# EAGLE board MK-312BT V1.3B (EAGLE 6.6.0)
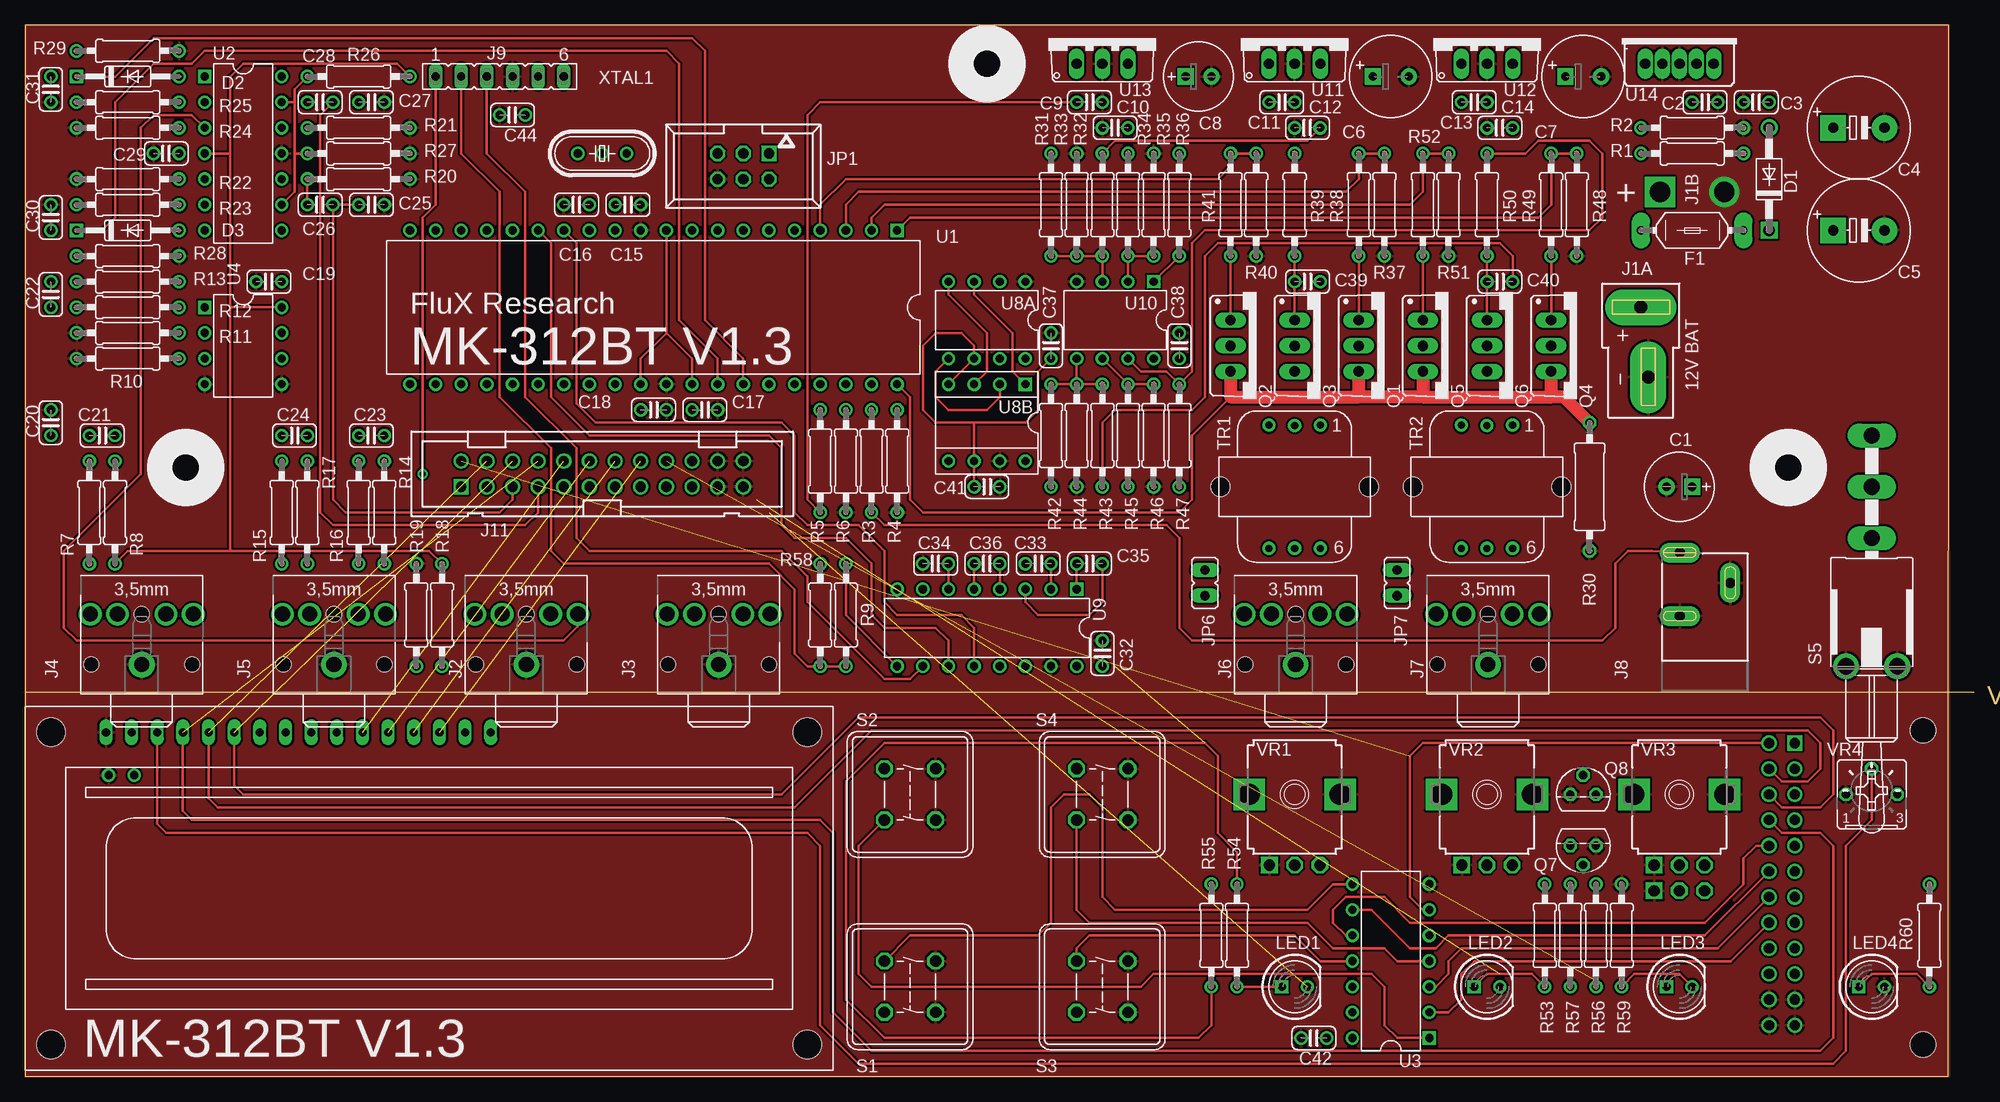
[diagram p0: board, top side]
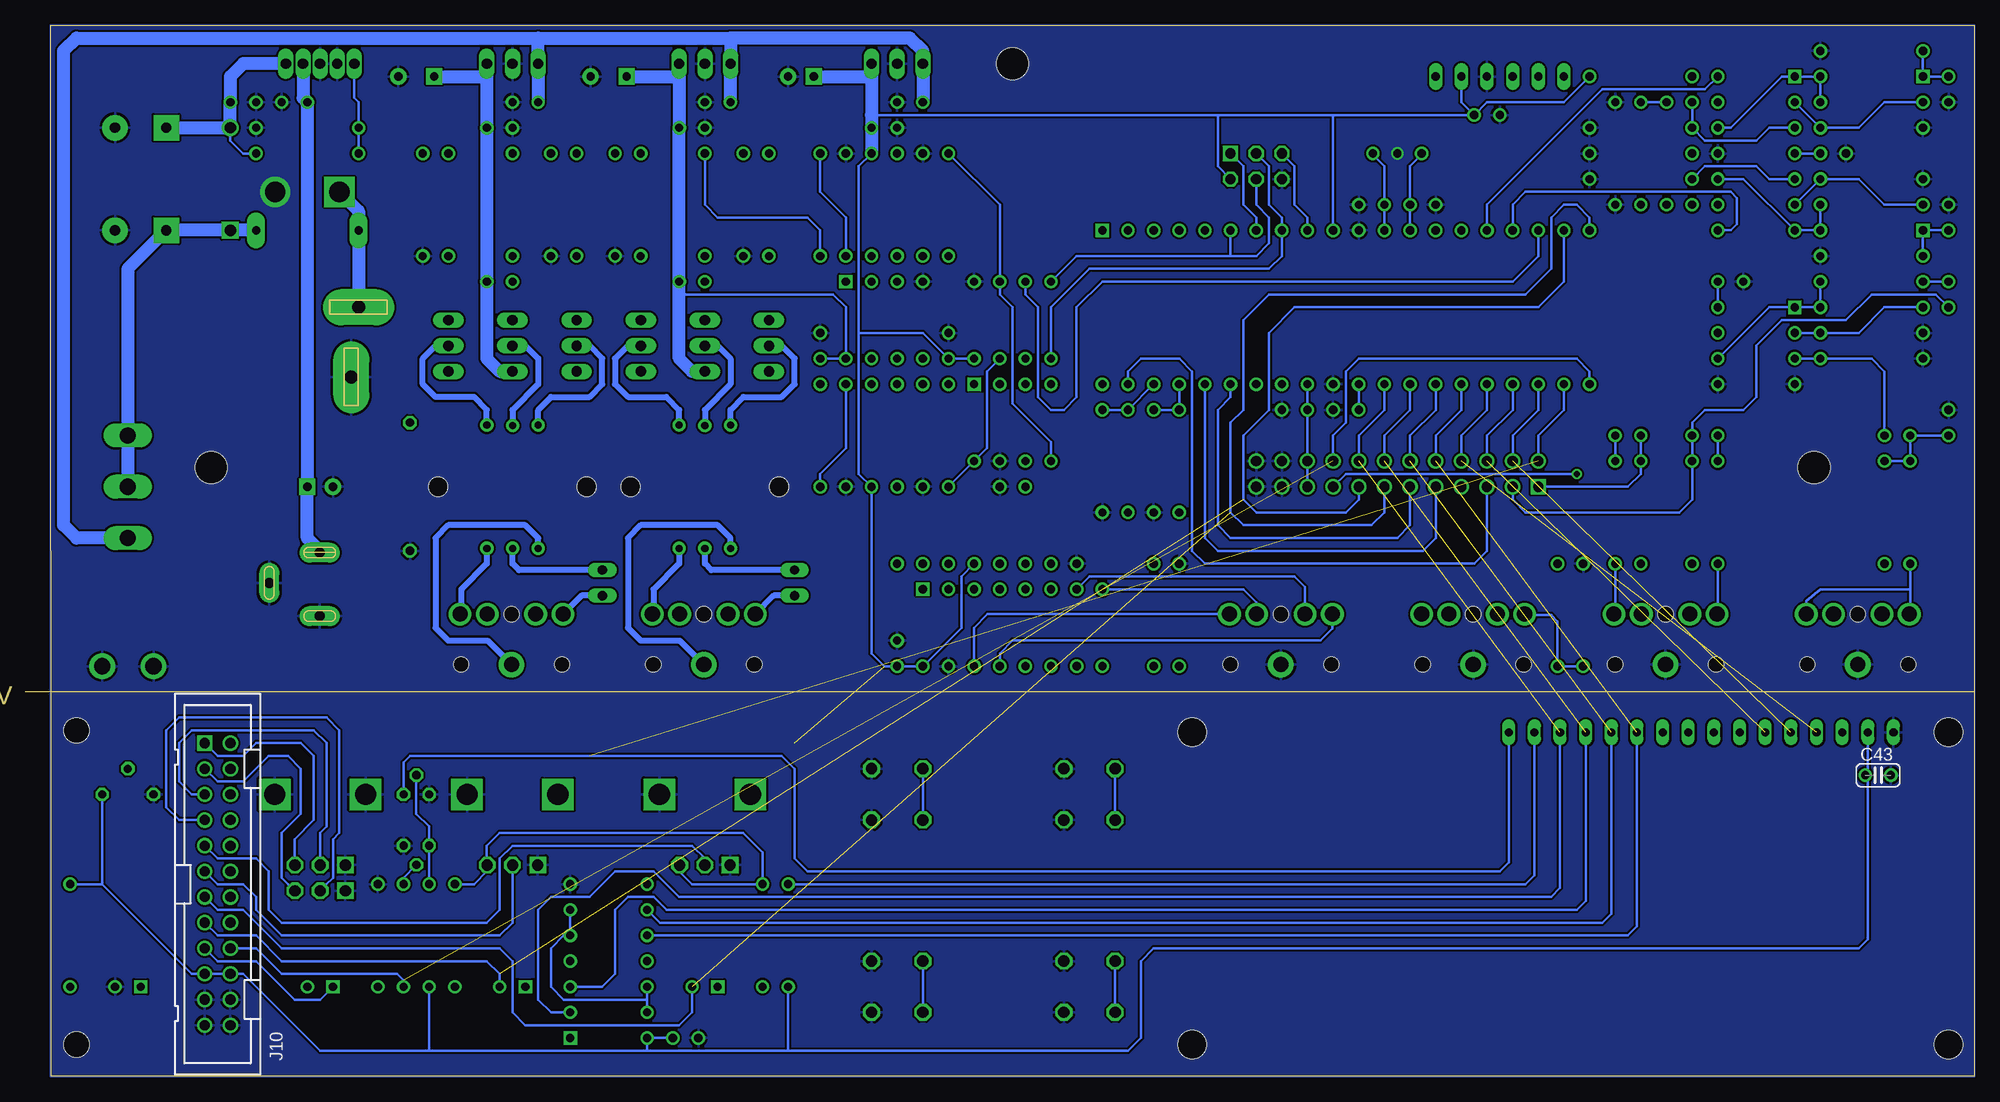
[diagram p1: board, bottom side, seen from below]

Size 193.04 x 104.14 mm. Coordinates in mm from the lower left corner, seen from the top.
Outline: 0,38.1 0,104.14 190.5,104.14 190.48,0 0,0 0,38.1
Outline: 0,38.1 193.04,38.1
Copper layers (1*16): Top 0.035mm / dielectric 1.5mm / Bottom 0.035mm
Design rules "default *": minimum track width 10mil, minimum drill 24mil, track to track 8mil, track to pad 8mil, pad to pad 8mil, via to via 8mil, smd to smd 8mil, copper to edge 0mil, drill to drill 8mil, minimum pad ring 10mil, minimum via ring 8mil, stop-mask expansion 4mil, vias tented up to drill 0mil, thermal gap 10mil
Net classes: 0 default: width 0.4 mm; 1 signal: width 0.254 mm; 2 pwr: width 2 mm
Holes 3.2 mm at 15.88,60.33 174.62,60.33 95.25,100.33
Holes 2.5 mm at 187.96,34.29 187.96,3.17

## Footprints (pad centres in the part's own frame; a part is rotated, then mirrored left to right if it is on the bottom)
E2,5-7 = drill 0.813 pad 1.6 square: + -1.27,0 | drill 0.813 pad 1.6: - 1.27,0
C025-024X044 = drill 0.813: 1 -1.27,0; 2 1.27,0
E5-10,5 = drill 1.016 pad 2.54 square: + -2.54,0 | drill 1.016 pad 2.54: - 2.54,0
E3,5-8 = drill 0.813 pad 1.6 square: + -1.778,0 | drill 0.813 pad 1.6: - 1.778,0
DO41-10 = drill 1.118: A 5.08,0 | drill 1.118 square: C -5.08,0
DO35-10 = drill 0.813: A 5.08,0 | drill 0.813 square: C -5.08,0
LITTLEFUSE = drill 0.813 pad 1.778 long: 1 -5.08,0; 2 5.08,0
DEANS = drill 1.27 pad 3.556 long: + 0,0; - 0.737,-6.921
STX3100 = drill 1.5 pad 2.54: 1 2.7,-0.1 | drill 1.5: 2 7.7,5; 3 7.7,2.3; 4 7.7,-2.5; 5 7.7,-5.2 | hole 1.5: 2.7,4.9; 2.7,-5.1; 7.7,-0.1
POWER_JACK_SLOT = drill 1 pad 2 long: GND@1 2.58,7.5; GND@2 7.58,10.8; PWR 2.58,13.8
FE06 = drill 0.813 long: 1 -6.35,0; 2 -3.81,0; 3 -1.27,0; 4 1.27,0; 5 3.81,0; 6 6.35,0
PAK100/2500-24 = drill 1 pad 1.422 square: 1 -13.97,-1.27 | drill 1 pad 1.422: 2 -13.97,1.27; 3 -11.43,-1.27; 4 -11.43,1.27; 5 -8.89,-1.27; 6 -8.89,1.27; 7 -6.35,-1.27; 8 -6.35,1.27; 9 -3.81,-1.27; 10 -3.81,1.27; 11 -1.27,-1.27; 12 -1.27,1.27; 13 1.27,-1.27; 14 1.27,1.27; 15 3.81,-1.27; 16 3.81,1.27; 17 6.35,-1.27; 18 6.35,1.27; 19 8.89,-1.27; 20 8.89,1.27; 21 11.43,-1.27; 22 11.43,1.27; 23 13.97,-1.27; 24 13.97,1.27
057-006-1 = drill 1 square: 1 -2.54,-1.27 | drill 1 octagon: 2 -2.54,1.27; 3 0,-1.27; 4 0,1.27; 5 2.54,-1.27; 6 2.54,1.27
JP1 = drill 0.914 long: 1 0,-1.27; 2 0,1.27
LCD1602 = drill 0.8 long: 1 8,33.46; 2 10.54,33.46; 3 13.08,33.46; 4 15.62,33.46; 5 18.16,33.46; 6 20.7,33.46; 7 23.24,33.46; 8 25.78,33.46; 9 28.32,33.46; 10 30.86,33.46; 11 33.4,33.46; 12 35.94,33.46; 13 38.48,33.46; 14 41.02,33.46; 15 43.56,33.46; 16 46.1,33.46 | hole 2.8: 2.54,2.54; 2.54,33.46; 77.46,33.46; 77.46,2.54
LED5MM = drill 0.813 square: A -1.27,0 | drill 0.813: K 1.27,0
TO220V = drill 1.016 long: 1 -2.54,-2.54; 2 0,-2.54; 3 2.54,-2.54
TO92 = drill 0.813 octagon: 1 1.27,0; 2 0,1.905; 3 -1.27,0
0207/10 = drill 0.813: 1 -5.08,0; 2 5.08,0
0309/12 = drill 0.813 octagon: 1 -6.35,0; 2 6.35,0
DTE6K = drill 1.118 octagon: 1 -2.54,2.54; 2 2.54,2.54; 3 2.54,-2.54; 4 -2.54,-2.54
LPV-1 = drill 1.6 long: 1 0,12.7; 2 0,17.78; 3 0,22.86 | drill 1.6 pad 2.54: B -2.54,0; B1 2.54,0
42TL = drill 0.7 pad 1.3: 1 -2.54,-6.096; 2 0,-6.068; 3 2.54,-6.096; 4 2.54,6.096; 5 0,6.096; 6 -2.54,6.096 | hole 1.9: -7.353,0; 7.353,0
DIL40 = drill 0.813 square: 1 -24.13,-7.62 | drill 0.813: 2 -21.59,-7.62; 3 -19.05,-7.62; 4 -16.51,-7.62; 5 -13.97,-7.62; 6 -11.43,-7.62; 7 -8.89,-7.62; 8 -6.35,-7.62; 9 -3.81,-7.62; 10 -1.27,-7.62; 11 1.27,-7.62; 12 3.81,-7.62; 13 6.35,-7.62; 14 8.89,-7.62; 15 11.43,-7.62; 16 13.97,-7.62; 17 16.51,-7.62; 18 19.05,-7.62; 19 21.59,-7.62; 20 24.13,-7.62; 21 24.13,7.62; 22 21.59,7.62; 23 19.05,7.62; 24 16.51,7.62; 25 13.97,7.62; 26 11.43,7.62; 27 8.89,7.62; 28 6.35,7.62; 29 3.81,7.62; 30 1.27,7.62; 31 -1.27,7.62; 32 -3.81,7.62; 33 -6.35,7.62; 34 -8.89,7.62; 35 -11.43,7.62; 36 -13.97,7.62; 37 -16.51,7.62; 38 -19.05,7.62; 39 -21.59,7.62; 40 -24.13,7.62
DIL14 = drill 0.813 square: 1 -7.62,-3.81 | drill 0.813: 2 -5.08,-3.81; 3 -2.54,-3.81; 4 0,-3.81; 5 2.54,-3.81; 6 5.08,-3.81; 7 7.62,-3.81; 8 7.62,3.81; 9 5.08,3.81; 10 2.54,3.81; 11 0,3.81; 12 -2.54,3.81; 13 -5.08,3.81; 14 -7.62,3.81
DIL08 = drill 0.813 pad 1.27 square: 1 -3.81,-3.81 | drill 0.813 pad 1.27: 2 -1.27,-3.81; 3 1.27,-3.81; 4 3.81,-3.81; 5 3.81,3.81; 6 1.27,3.81; 7 -1.27,3.81; 8 -3.81,3.81
DIL08' = drill 0.813 pad 1.27: 1 -3.81,-3.81; 2 -1.27,-3.81; 3 1.27,-3.81; 4 3.81,-3.81; 5 3.81,3.81; 6 1.27,3.81; 7 -1.27,3.81; 8 -3.81,3.81
SOCKET-08 = drill 0.813 square: 1 -3.81,-3.81 | drill 0.813: 2 -1.27,-3.81; 3 1.27,-3.81; 4 3.81,-3.81; 5 3.81,3.81; 6 1.27,3.81; 7 -1.27,3.81; 8 -3.81,3.81
DIL16 = drill 0.813 square: 1 -8.89,-3.81 | drill 0.813: 2 -6.35,-3.81; 3 -3.81,-3.81; 4 -1.27,-3.81; 5 1.27,-3.81; 6 3.81,-3.81; 7 6.35,-3.81; 8 8.89,-3.81; 9 8.89,3.81; 10 6.35,3.81; 11 3.81,3.81; 12 1.27,3.81; 13 -1.27,3.81; 14 -3.81,3.81; 15 -6.35,3.81; 16 -8.89,3.81
TO220-5KC = drill 1.016 pad 1.372 long: 1 -3.391,-2.54; 2 -1.689,-2.54; 3 0.013,-2.54; 4 1.702,-2.54; 5 3.391,-2.54
9MM_SNAP-IN_POT = drill 1.1 square: 1 -2.5,-7 | drill 1.1 octagon: 2 0,-7; 3 2.5,-7 | drill 2.1 square: CHASSIS1 -4.5,0; CHASSIS2 4.5,0
DUAL_9MM_SNAP-IN_POT = drill 1.1 square: 1 -2.5,-7; 1B -2.5,-9.54 | drill 1.1 octagon: 2 0,-7; 2B 0,-9.54; 3 2.5,-7; 3B 2.5,-9.54 | drill 2.1 square: CHASSIS1 -4.5,0; CHASSIS2 4.5,0
B25P = drill 0.813 octagon: A -2.54,0; E 2.54,0; S 0,2.54
HC49/S = drill 0.813: 1 -2.413,0; 2 2.413,0

## Placement (x,y rotation side)
C1  10uF  [E2,5-7]  163.83,58.42 180 top
C2  0.1uF  [C025-024X044]  166.37,96.52 0 top
C3  0.1uF  [C025-024X044]  171.45,96.52 180 top
C4  1000uF  [E5-10,5]  181.61,93.98 0 top
C5  1000uF  [E5-10,5]  181.61,83.82 0 top
C6  470uF  [E3,5-8]  135.25,99.06 0 top
C7  470uF  [E3,5-8]  154.31,99.06 0 top
C8  10uF  [E2,5-7]  116.2,99.06 0 top
C9  0.1uF  [C025-024X044]  105.41,96.52 0 top
C10  0.1uF  [C025-024X044]  107.95,93.98 180 top
C11  0.1uF  [C025-024X044]  124.46,96.52 0 top
C12  0.1uF  [C025-024X044]  127,93.98 180 top
C13  0.1uF  [C025-024X044]  143.51,96.52 0 top
C14  0.1uF  [C025-024X044]  146.05,93.98 180 top
C15  18pF  [C025-024X044]  59.69,86.36 0 top
C16  18pF  [C025-024X044]  54.61,86.36 180 top
C17  0.1uF  [C025-024X044]  67.31,66.04 0 top
C18  0.1uF  [C025-024X044]  62.23,66.04 0 top
C19  0.1uF  [C025-024X044]  24.13,78.74 180 top
C20  1uF  [C025-024X044]  2.54,64.77 90 top
C21  0.1uF  [C025-024X044]  7.62,63.5 0 top
C22  0.1uF  [C025-024X044]  2.54,77.47 90 top
C23  0.1uF  [C025-024X044]  34.29,63.5 180 top
C24  0.1uF  [C025-024X044]  26.67,63.5 0 top
C25  1nF  [C025-024X044]  34.29,86.36 0 top
C26  0.1uF  [C025-024X044]  29.21,86.36 180 top
C27  1nF  [C025-024X044]  34.29,96.52 0 top
C28  0.1uF  [C025-024X044]  29.21,96.52 180 top
C29  0.1uF  [C025-024X044]  13.97,91.44 180 top
C30  1uF  [C025-024X044]  2.54,85.09 90 top
C31  1uF  [C025-024X044]  2.54,97.79 270 top
C32  0.1uF  [C025-024X044]  106.68,41.91 90 top
C33  1uF  [C025-024X044]  100.33,50.8 0 top
C34  1uF  [C025-024X044]  90.17,50.8 180 top
C35  1uF  [C025-024X044]  105.41,50.8 0 top
C36  1uF  [C025-024X044]  95.25,50.8 180 top
C37  0.1uF  [C025-024X044]  101.6,72.39 90 top
C38  0.1uF  [C025-024X044]  114.3,72.39 90 top
C39  0.1uF  [C025-024X044]  127,78.74 0 top
C40  0.1uF  [C025-024X044]  146.05,78.74 0 top
C41  0.1uF  [C025-024X044]  95.25,58.42 0 top
C42  0.1uF  [C025-024X044]  127.64,3.81 180 top
C43  0.1uF  [C025-024X044]  9.53,29.84 0 bottom
C44  0.1uF  [C025-024X044]  48.26,95.25 180 top
D1  1N4004  [DO41-10]  172.72,88.9 90 top
D2  1N4148DO35-10  [DO35-10]  10.16,99.06 0 top
D3  1N4148DO35-10  [DO35-10]  10.16,83.82 0 top
F1  1A POLY  [LITTLEFUSE]  165.1,83.82 0 top
J1  +12V BATTERY  [DEANS]  160.02,76.2 0 top
J2  REMOTE INPUT  [STX3100]  49.53,38.1 90 top
J3  LINK INPUT  [STX3100]  68.58,38.1 90 top
J4  MIC INPUT  [STX3100]  11.43,38.1 90 top
J5  LINE INPUT  [STX3100]  30.48,38.1 90 top
J6  OUTPUT A  [STX3100]  125.73,38.1 90 top
J7  OUTPUT B  [STX3100]  144.78,38.1 90 top
J8  VDC INPUT  [POWER_JACK_SLOT]  161.29,38.1 0 top
J9  RADIO INTERFACE  [FE06]  46.99,99.06 0 top
J10  2524-  [PAK100/2500-24]  173.99,19.05 270 bottom
J11  FRONT PANEL  [PAK100/2500-24]  57.15,59.69 0 top
JP1  ISP  [057-006-1]  71.12,90.17 180 top
JP6  [JP1]  116.84,48.9 180 top
JP7  [JP1]  135.89,48.9 180 top
LCD1  HD44780LCD-1602  [LCD1602]  0,0.64 0 top
LED1  OUTPUT A  [LED5MM]  125.73,8.89 0 top
LED2  OUTPUT B  [LED5MM]  144.78,8.89 0 top
LED3  RADIO  [LED5MM]  163.83,8.89 0 top
LED4  POWER  [LED5MM]  182.88,8.89 0 top
Q1  IRL520N  [TO220V]  134.62,72.39 270 top
Q2  IRL520N  [TO220V]  121.92,72.39 270 top
Q3  IRF9Z24  [TO220V]  128.27,72.39 270 top
Q4  IRL520N  [TO220V]  153.67,72.39 270 top
Q5  IRL520N  [TO220V]  140.97,72.39 270 top
Q6  IRF9Z24  [TO220V]  147.32,72.39 270 top
Q7  2N3904  [TO92]  154.31,22.86 180 top
Q8  2N3904  [TO92]  154.31,27.94 0 top
R1  12K  [0207/10]  165.1,91.44 0 top
R2  1.2K  [0207/10]  165.1,93.98 180 top
R3  100K  [0207/10]  83.82,60.96 270 top
R4  20K  [0207/10]  86.36,60.96 90 top
R5  10K  [0207/10]  78.74,60.96 270 top
R6  3.3K  [0207/10]  81.28,60.96 90 top
R7  4.7K  [0207/10]  6.35,55.88 90 top
R8  4.7K  [0207/10]  8.89,55.88 270 top
R9  4.7K  [0207/10]  81.28,45.72 90 top
R10  100K  [0207/10]  10.16,71.12 0 top
R11  20K  [0207/10]  10.16,73.66 0 top
R12  1M  [0207/10]  10.16,76.2 0 top
R13  47K  [0207/10]  10.16,78.74 180 top
R14  1K  [0207/10]  35.56,55.88 90 top
R15  1K  [0207/10]  25.4,55.88 90 top
R16  20K  [0207/10]  33.02,55.88 270 top
R17  20K  [0207/10]  27.94,55.88 270 top
R18  1.5K  [0207/10]  41.27,45.72 90 top
R19  1K  [0207/10]  38.73,45.72 270 top
R20  100K  [0207/10]  33.02,88.9 180 top
R21  100K  [0207/10]  33.02,93.98 180 top
R22  20K  [0207/10]  10.16,88.9 0 top
R23  1M  [0207/10]  10.16,86.36 0 top
R24  20K  [0207/10]  10.16,93.98 180 top
R25  1M  [0207/10]  10.16,96.52 0 top
R26  1M  [0207/10]  33.02,99.06 0 top
R27  100K  [0207/10]  33.02,91.44 0 top
R28  100K  [0207/10]  10.16,81.28 0 top
R29  100K  [0207/10]  10.16,101.6 0 top
R30  0.5R  [0309/12]  154.94,58.42 90 top
R31  100K  [0207/10]  101.6,86.36 270 top
R32  100K  [0207/10]  106.68,86.36 90 top
R33  100K  [0207/10]  104.14,86.36 270 top
R34  100K  [0207/10]  109.22,86.36 90 top
R35  200K  [0207/10]  111.76,86.36 270 top
R36  100K  [0207/10]  114.3,86.36 270 top
R37  100K  [0207/10]  134.62,86.36 90 top
R38  10K  [0207/10]  132.08,86.36 270 top
R39  10K  [0207/10]  125.73,86.36 270 top
R40  100K  [0207/10]  121.92,86.36 90 top
R41  10K  [0207/10]  119.38,86.36 270 top
R42  100K  [0207/10]  101.6,63.5 90 top
R43  100K  [0207/10]  106.68,63.5 270 top
R44  100K  [0207/10]  104.14,63.5 90 top
R45  100K  [0207/10]  109.22,63.5 270 top
R46  200K  [0207/10]  111.76,63.5 90 top
R47  100K  [0207/10]  114.3,63.5 90 top
R48  100K  [0207/10]  153.67,86.36 90 top
R49  10K  [0207/10]  151.13,86.36 270 top
R50  10K  [0207/10]  144.78,86.36 270 top
R51  100K  [0207/10]  140.97,86.36 90 top
R52  10K  [0207/10]  138.43,86.36 270 top
R53  390  [0207/10]  150.5,13.97 90 top
R54  390  [0207/10]  120.02,13.97 90 top
R55  47  [0207/10]  117.47,13.97 270 top
R56  1.5K  [0207/10]  155.57,13.97 270 top
R57  1.5K  [0207/10]  153.03,13.97 90 top
R58  10K  [0207/10]  78.74,45.72 270 top
R59  390  [0207/10]  158.12,13.97 90 top
R60  390  [0207/10]  188.59,13.97 90 top
S1  OK  [DTE6K]  87.63,8.89 90 top
S2  MENU  [DTE6K]  87.63,27.94 90 top
S3  LEFT/DOWN  [DTE6K]  106.68,8.89 90 top
S4  RIGHT/UP  [DTE6K]  106.68,27.94 90 top
S5  POWER  [LPV-1]  182.88,40.64 0 top
TR1  42TL004  [42TL]  125.73,58.42 180 top
TR2  42TL004  [42TL]  144.78,58.42 180 top
U1  ATMEGA16-P  [DIL40]  62.23,76.2 180 top
U2  LM324N  [DIL14]  21.59,91.44 270 top
U3  4066N  [DIL14]  135.25,11.43 90 top
U4  LM358N  [DIL08]  21.59,72.39 270 top
U8A  MAX548  [DIL08']  95.25,74.93 180 top
U8B  LTC1661  [SOCKET-08]  95.25,64.77 180 top
U9  MAX232  [DIL16]  95.25,44.45 180 top
U10  LM358N  [DIL08]  107.95,74.93 180 top
U11  7809TV  [TO220V]  125.73,102.87 0 top
U12  7809TV  [TO220V]  144.78,102.87 0 top
U13  7805TV  [TO220V]  106.68,102.87 0 top
U14  LM2941K  [TO220-5KC]  163.83,102.87 0 top
VR1  LEVEL A  [9MM_SNAP-IN_POT]  125.73,27.94 0 top
VR2  LEVEL B  [9MM_SNAP-IN_POT]  144.78,27.94 0 top
VR3  MULTI-ADJ  [DUAL_9MM_SNAP-IN_POT]  163.83,27.94 0 top
VR4  LCD CONTRAST  [B25P]  182.88,27.94 0 top
XTAL1  8.0 MHz  [HC49/S]  57.15,91.44 180 top

## Library data of the parts
C1-C44 R1-R60 = rcl
D1-D3 = diode
F1 = fuse; OC_FARNELL: unknown; OC_NEWARK: unknown
J1 = SparkFun-Connectors
J2-J7 LCD1 = adafruit
J8 = SparkFun-Connectors; PROD_ID: PRT-00119
J9 = con-lsta; OC_FARNELL: unknown; OC_NEWARK: unknown
J10 J11 = con-3m; OC_FARNELL: unknown; OC_NEWARK: unknown
JP1 = con-panduit; OC_FARNELL: unknown; OC_NEWARK: unknown
JP6 JP7 = jumper
LED1-LED4 = led
Q1-Q6 = transistor-fet-1
Q7 Q8 = transistor-neu-to92
S1-S4 = switch-misc
S5 = switch
TR1 TR2 = trafo-xicon; OC_FARNELL: unknown; OC_NEWARK: unknown
U1 = atmel; MPN: ATMEGA16-16PU; OC_FARNELL: 9171142; OC_NEWARK: 01M6885
U2 U4 U10-U13 = linear
U3 = 40xx
U8A = JAEB
U8B = ic-package
U9 = maxim; MF: MAXIM; MPN: MAX232ACPE+; OC_FARNELL: 9723773; OC_NEWARK: 68K4544
U14 = national-semi
VR1-VR3 = MusicThingModular
VR4 = pot
XTAL1 = crystal; OC_FARNELL: 1667008; OC_NEWARK: unknown

## Nets
!CS: U1.18 U8A.3 U8B.1
+5V: C8.+ C10.1 C17.1 C18.1 C19.1 C29.1 C32.1 C33.1 C37.1 C41.1 C42.1 C43.1 C44.1 J9.5 J10.19 J10.20 J11.19 J11.20 JP1.2 LCD1.2 R8.2 R16.2 R17.2 R18.2 R26.2 R34.2 R45.2 R53.2 R54.2 R55.2 R57.1 R60.2 U1.10 U1.30 U1.32 U2.4 U3.14 U4.8 U8A.6 U8A.8 U8B.4 U8B.6 U9.16 U13.3 VR1.3 VR2.3 VR4.E
+8V: C6.+ C12.1 C38.1 C39.2 Q3.3 R32.2 U10.8 U11.3
+9V: C7.+ C14.1 C40.2 Q6.3 R43.2 U12.3
+12V: C9.1 C11.1 C13.1 R5.2 S5.1 U11.1 U12.1 U13.1
GND: C1.- C2.2 C3.2 C4.- C5.- C6.- C7.- C8.- C9.2 C10.2 C11.2 C12.2 C13.2 C14.2 C15.2 C16.2 C17.2 C18.2 C19.2 C20.2 C25.2 C27.2 C29.2 C30.2 C31.2 C32.2 C34.2 C37.2 C38.2 C41.2 C42.2 C43.2 C44.2 J1.- J2.1 J3.1 J4.1 J5.1 J8.GND@1 J8.GND@2 J9.4 J10.21 J10.22 J10.23 J10.24 J11.21 J11.22 J11.23 J11.24 JP1.6 LCD1.1 LED4.K Q7.3 Q8.3 R2.1 R4.1 R6.1 R10.1 R11.1 R19.1 R20.1 R21.1 R22.1 R24.2 R27.2 R28.2 R29.2 R30.1 R33.1 R35.1 R37.1 R40.1 R44.1 R46.1 R48.1 R51.1 R58.1 R59.2 S1.3 S1.4 S2.3 S2.4 S3.3 S3.4 S4.3 S4.4 S5.B S5.B1 U1.11 U1.31 U2.11 U3.7 U4.4 U4.5 U8A.1 U8B.7 U9.15 U10.4 U11.2 U12.2 U13.2 U14.2 U14.3 VR1.1 VR1.CHASSIS2 VR2.1 VR2.CHASSIS2 VR3.1 VR3.1B VR3.CHASSIS1 VR3.CHASSIS2 VR4.A
N$1: J10.7 VR3.2B
N$2: R5.1 R6.2 U1.37
N$3: R3.1 R4.2 U1.38
N$4: S1.1 S1.2 U3.8
N$5: S3.1 S3.2 U3.11
N$6: J6.1 TR1.4
N$7: S4.1 S4.2 U3.4
N$9: JP7.1 TR2.5
N$10: J10.3 VR3.3B
N$11: J10.9 VR1.2
N$12: J10.11 VR2.2
N$13: J10.1 VR3.3
N$14: C28.2 J2.5 R21.2 U2.3
N$15: J10.5 VR3.2
N$16: J6.5 TR1.6
N$17: C16.1 U1.13 XTAL1.2
N$18: Q1.1 R38.2
N$19: Q2.1 R41.2
N$20: J7.2 JP7.2
N$21: C39.1 Q3.1 R39.2
N$22: R31.2 R32.1 R33.2 U10.3
N$23: LED2.A R53.1
N$24: Q4.1 R49.2
N$25: Q5.1 R52.2
N$27: C40.1 Q6.1 R50.2
N$28: R42.2 R43.1 R44.2 U10.5
N$29: LED1.A R54.1
N$30: LCD1.3 VR4.S
N$31: F1.1 J1.+
N$32: C15.1 U1.12 XTAL1.1
N$33: R9.2 U9.9
N$34: Q1.2 TR1.1
N$35: Q3.2 TR1.2
N$36: Q4.2 TR2.1
N$37: Q6.2 TR2.2
N$38: Q5.2 TR2.3
N$39: Q2.2 TR1.3
N$40: R34.1 R35.2 R36.1 U10.2
N$41: R45.1 R46.2 R47.1 U10.6
N$42: R31.1 U8A.2 U8B.5
N$43: R1.1 R2.2 U14.1
N$44: J3.5 U9.14
N$45: C3.1 C4.+ D1.A R1.2 U14.5
N$46: J3.2 U9.13
N$47: LCD1.15 R55.1
N$48: J6.2 JP6.2
N$49: J7.5 TR2.6
N$50: J7.1 TR2.4
N$51: JP6.1 TR1.5
N$52: C35.1 U9.1
N$53: R24.1 R25.1 U2.2
N$54: D2.A R25.2 U2.1 U2.12
N$55: J5.2 R15.1
N$56: J5.5 R14.1
N$57: C23.1 R14.2
N$58: J2.2 R18.1 R19.2
N$60: R22.2 R23.1 U2.6
N$61: C35.2 U9.3
N$62: R26.1 R27.1 U2.9 U2.13
N$63: C26.2 R20.2 U2.5
N$65: C24.1 R15.2
N$66: C36.2 U9.5
N$67: C36.1 U9.4
N$68: J9.2 R9.1 R58.2
N$69: D3.A R23.2 U2.7 U2.10
N$70: C34.1 U9.6
N$71: J4.2 J4.5 R7.1
N$72: C20.1 C21.1 R7.2 R8.1
N$73: C21.2 R10.2 U4.3
N$74: R11.2 R12.1 U4.2
N$75: R12.2 R13.1 U4.1 U4.6
N$76: C22.2 R13.2
N$77: C33.2 U9.2
N$78: C5.+ D1.C F1.2 S5.2 S5.3
N$79: LED3.K R59.1
N$80: S2.1 S2.2 U3.1
N$81: LED4.A R60.1
N$82: Q7.2 R56.1
N$83: Q7.1 Q8.2 R57.2
N$84: LCD1.16 Q8.1
N$85: R42.1 U8A.7 U8B.8
N$86: J10.17 LED3.A
N$87: J3.4 U9.8
N$88: J3.3 U9.7
N$89: J9.3 U9.10
PA0: Q1.3 Q2.3 Q4.3 Q5.3 R30.2 U1.40
PA1: C25.1 C26.1 J11.5 U1.39
PA4: J11.9 U1.36
PA5: J11.11 U1.35
PA6: C31.1 D2.C R29.1 U1.34
PA7: C30.1 D3.C R28.1 U1.33
PB0: R48.2 R49.1 U1.1
PB1: R51.2 R52.1 U1.2
PB2: R37.2 R38.1 U1.3
PB3: R40.2 R41.1 U1.4
PB5: JP1.4 U1.6 U8A.4 U8B.3
PB6: JP1.1 U1.7
PB7: JP1.3 U1.8 U8A.5 U8B.2
PC0: J10.2 J11.2 U1.22 U3.5 U3.6 U3.12 U3.13
PC1: J10.4 J11.4 LCD1.5 U1.23
PC2: J10.6 J11.6 LCD1.6 U1.24
PC3: J10.8 J11.8 LCD1.4 U1.25
PC4: J10.10 J11.10 LCD1.11 U1.26 U3.10
PC5: J10.12 J11.12 LCD1.12 U1.27 U3.9
PC6: J10.14 J11.14 LCD1.13 U1.28 U3.3
PC7: J10.16 J11.16 LCD1.14 U1.29 U3.2
PD0: U1.14 U9.12
PD1: U1.15 U9.11
PD2: U1.16 U2.14
PD3: U1.17 U2.8
PD5: J10.15 J11.15 LED2.K U1.19
PD6: J10.13 J11.13 LED1.K U1.20
PD7: J10.18 J11.18 R56.2 U1.21
PFET_A: R36.2 R39.1 U10.1
PFET_B: R47.2 R50.1 U10.7
RB4: C27.1 C28.1 J11.7
RB9: C22.1 C24.2 J11.3 R17.1
RB10: C23.2 J11.1 R16.1
RESET: JP1.5 U1.9
STATE: J9.1 J11.17
V+: C1.+ C2.1 J8.PWR R3.2 U14.4

## Tracks (layer width: path | path; a pad name or v marks a point on that pad's centre or on a via)
!CS
  Top 0.254: U8B.1 97.79,69.85 97.79,73.66 93.98,77.47 U8A.3
  Bottom 0.254: U8A.3 93.98,77.47 92.71,76.2 92.71,67.31 91.44,66.04 90.17,66.04 88.9,67.31 88.9,76.2 86.36,78.74 45.72,78.74 43.18,81.28 U1.18
+5V  (1 unrouted)
  Top 0.254: 63.5,73.66 66.04,71.12 U1.32 | U1.30 60.96,71.12 63.5,73.66 | U1.10 63.5,73.66 | 33.02,52.07 40.01,52.07 R18.2 | 33.02,52.07 R16.2 | R17.2 27.94,52.07 | 27.94,52.07 33.02,52.07 | R8.2 10.16,52.07 20.32,52.07 | 20.32,52.07 27.94,52.07 | U4.8 20.32,76.2 | 20.32,76.2 20.32,52.07 | U2.4 20.32,91.44 | 20.32,91.44 20.32,76.2 | 20.32,91.44 20.32,99.06 21.59,100.33 36.83,100.33 R26.2 | U8B.4 U8A.6 93.98,72.39 92.71,73.66 90.17,73.66 88.9,72.39 88.9,66.04 90.17,64.77 93.98,64.77 | 93.98,64.77 U8B.6 C41.1 | 93.98,64.77 99.06,64.77 100.33,66.04 100.33,69.85 C37.1 | R54.2 120.02,22.23 118.11,24.13 118.11,31.75 116.84,33.02 85.09,33.02 81.28,29.21 81.28,7.62 85.09,3.81 116.2,3.81 117.47,5.08 R55.2
  Bottom 0.254: R34.2 110.49,90.17 110.49,73.66 | 110.49,73.66 110.49,59.69 R45.2 109.22,41.91 107.95,40.64 C32.1 U9.16 100.33,44.45 100.33,49.53 C33.1 | J11.19 J11.20 C17.1 U1.32 | C19.1 U4.8 | C29.1 U2.4 | 63.5,95.25 U1.10 | 110.49,73.66 104.14,73.66 C37.1 U8A.8 | U1.30 C18.1 | C44.1 50.8,96.52 J9.5 | R26.2 40.64,96.52 48.26,96.52 C44.1 | 74.93,95.25 63.5,95.25 | JP1.2 74.93,90.17 74.93,95.25 | 74.93,95.25 109.22,95.25 | 63.5,95.25 C44.1 | VR1.3 128.23,20.36 | 128.23,20.36 128.27,20.32 | VR4.E 185.42,19.05 | 185.42,19.05 R60.2 | 153.03,2.54 163.83,2.54 171.45,10.16 J10.20 J10.19 176.53,10.16 185.42,19.05 | R57.1 153.03,2.54 | R55.2 117.47,2.54 | 117.47,2.54 131.44,2.54 | 131.44,2.54 153.03,2.54 | 131.44,2.54 U3.14 C42.1 | 128.23,20.36 128.23,20.28 127,19.05 R54.2 120.02,22.23 121.92,24.13 146.05,24.13 147.32,22.86 147.32,20.98 VR2.3 147.28,20.36 148.59,19.05 R53.2 | LCD1.2 10.54,29.21 | 10.54,29.21 10.54,13.59 11.43,12.7 81.28,12.7 82.55,11.43 82.55,3.81 83.82,2.54 117.47,2.54 | C43.1 10.79,29.46 10.54,29.21
  Bottom 1.27: U13.3 109.22,99.06 | 109.22,99.06 109.22,95.25 C10.1 R34.2 | C8.+ 109.22,99.06
+8V
  Top 0.254: R32.2 107.95,92.71 127,92.71 C12.1
  Bottom 0.254: C38.1 U10.8 111.76,76.2 113.03,77.47 128.27,77.47
  Bottom 1.27: U11.3 128.27,99.06 | 128.27,99.06 C12.1 C39.2 128.27,77.47 128.27,71.12 127,69.85 Q3.3 | C6.+ 128.27,99.06
+9V
  Top 0.254: R43.2 106.68,64.77 107.95,66.04 115.57,66.04 116.84,67.31 116.84,81.28 118.11,82.55 146.05,82.55 147.32,81.28 C40.2
  Bottom 1.27: U12.3 147.32,99.06 | 147.32,99.06 C14.1 C40.2 147.32,71.12 146.05,69.85 Q6.3 | C7.+ 147.32,99.06
+12V
  Top 0.254: R5.2 77.47,57.15 77.47,95.25 78.74,96.52 C9.1
  Bottom 1.27: C13.1 U12.1 142.24,102.87 | C11.1 U11.1 123.19,102.87 | C9.1 U13.1 104.14,101.6 105.41,102.87 123.19,102.87 | 142.24,102.87 123.19,102.87 | S5.1 187.96,53.34 189.23,54.61 189.23,101.6 187.96,102.87 142.24,102.87
GND  (via drill 0.8, 2 pad 2.54)
  other vias: 57.15,91.44 168.28,87.63
  pour Bottom: 0,104.14 190.5,104.14 190.5,0 0,0
  pour Top: 0,104.14 190.5,104.14 190.5,0 0,0
N$1
  Bottom 0.254: VR3.2B 163.21,19.04 162.56,19.68 162.56,23.5 161.93,24.13 161.93,34.29 163.19,35.56 177.8,35.56 179.07,34.29 179.07,26.67 177.8,25.4 J10.7
N$2
  Bottom 0.254: U1.37 R5.1 R6.2
N$3
  Bottom 0.254: U1.38 R3.1 R4.2
N$4
  Top 0.254: U3.8 129.54,19.05 127,16.51 107.95,16.51 106.68,17.78 106.68,26.67 105.41,27.94 102.87,27.94 101.6,26.67 101.6,15.24 100.33,13.97 87.63,13.97 S1.2
  Bottom 0.254: S1.2 S1.1
N$5
  Top 0.254: U3.11 128.27,11.43 125.73,13.97 105.41,13.97 104.14,12.7 S3.2
  Bottom 0.254: S3.2 S3.1
N$6
  Bottom 0.61: TR1.4 123.19,53.34 124.46,54.61 132.08,54.61 133.35,53.34 133.35,44.45 132.08,43.18 128.21,43.18 J6.1
N$7
  Top 0.254: U3.4 135.89,11.43 134.62,12.7 129.54,12.7 127,15.24 105.41,15.24 104.14,16.51 S4.1
  Bottom 0.254: S4.2 S4.1
N$9
  Bottom 0.61: JP7.1 144.15,50.16 144.78,50.8 TR2.5
N$10
  Bottom 0.254: VR3.3B 166.99,19.04 167.64,19.68 167.64,24.13 165.74,26.04 165.74,30.48 167,31.75 168.91,31.75 171.45,29.21 173.99,29.21 J10.3
N$11
  Bottom 0.254: J10.9 173.99,21.59 170.18,21.59 168.91,20.32 168.91,16.51 167.64,15.24 147.32,15.24 146.05,16.51 146.05,21.59 144.78,22.86 127,22.86 125.73,21.59 VR1.2
N$12
  Bottom 0.254: J10.11 173.99,19.05 171.45,19.05 170.18,17.78 170.18,16.51 167.64,13.97 146.05,13.97 144.78,15.24 VR2.2
N$13
  Bottom 0.254: J10.1 173.99,31.75 171.45,31.75 170.18,33.02 165.74,33.02 164.47,31.75 164.47,25.4 166.37,23.5 166.37,20.98 VR3.3
N$14
  Top 0.254: U2.3 16.51,95.25 12.7,95.25 11.43,93.98 11.43,59.69 3.81,52.07 3.81,44.45 5.08,43.18 53.34,43.18 54.73,44.57 J2.5
  Bottom 0.254: U2.3 20.32,93.98 21.59,92.71 26.67,92.71 R21.2 C28.2
N$15
  Bottom 0.254: J10.5 176.53,27.94 177.8,29.21 177.8,33.02 176.53,34.29 164.47,34.29 163.19,33.02 163.19,24.77 163.83,24.13 VR3.2
N$16
  Bottom 0.61: J6.5 130.81,45.92 130.81,48.26 128.27,50.8 TR1.6
N$17
  Bottom 0.254: U1.13 C16.1 55.88,90.17 54.74,91.31 XTAL1.2
N$18
  Top 0.254: Q1.1 R38.2
N$19
  Top 0.254: R41.2 Q2.1
N$20
  Bottom 0.61: JP7.2 137.96,47.62 J7.2
N$21
  Top 0.254: Q3.1 C39.1 R39.2
N$22
  Top 0.254: U10.3 R32.1 R33.2 R31.2
N$23
  Top 0.254: LED2.A 144.78,10.16 149.22,10.16 R53.1
N$24
  Top 0.254: Q4.1 R49.2
N$25
  Top 0.254: Q5.1 R52.2
N$27
  Top 0.254: Q6.1 C40.1 R50.2
N$28
  Top 0.254: R42.2 R44.2 | R43.1 R44.2 | U10.5 R44.2
N$29
  Top 0.254: LED1.A R54.1
N$30
  Top 0.254: LCD1.3 13.08,25.02 13.97,24.13 77.47,24.13 78.74,22.86 78.74,5.08 82.55,1.27 179.07,1.27 180.34,2.54 180.34,22.86 182.88,25.4 VR4.S
N$31  (via drill 2 pad 2.54)
  Bottom 1.27: J1.+ F1.1 160.02,85.72 v161.93,87.63
N$32
  Bottom 0.254: U1.12 C15.1 58.42,90.17 59.56,91.31 XTAL1.1
N$33
  Top 0.254: U9.9 81.28,45.72 R9.2
N$34
  Bottom 0.61: Q1.2 133.35,72.39 134.62,71.12 134.62,68.58 133.35,67.31 129.54,67.31 128.27,66.04 TR1.1
N$35
  Bottom 0.61: Q3.2 124.46,72.39 123.19,71.12 123.19,68.58 125.73,66.04 TR1.2
N$36
  Bottom 0.61: Q4.2 152.4,72.39 153.67,71.12 153.67,68.58 152.4,67.31 148.59,67.31 147.32,66.04 TR2.1
N$37
  Bottom 0.61: Q6.2 143.51,72.39 142.24,71.12 142.24,68.58 144.78,66.04 TR2.2
N$38
  Bottom 0.61: Q5.2 137.16,72.39 135.89,71.12 135.89,68.58 137.16,67.31 140.97,67.31 142.24,66.04 TR2.3
N$39
  Bottom 0.61: Q2.2 118.11,72.39 116.84,71.12 116.84,68.58 118.11,67.31 121.92,67.31 123.19,66.04 TR1.3
N$40
  Top 0.254: U10.2 R34.1 R35.2
  Bottom 0.254: R36.1 114.3,87.63 111.76,85.09 R35.2
N$41
  Top 0.254: R46.2 R45.1 U10.6
  Bottom 0.254: R47.1 114.3,59.69 111.76,62.23 R46.2
N$42
  Bottom 0.254: U8B.5 91.44,62.87 95.25,66.67 95.25,76.2 96.52,77.47 U8A.2 96.52,86.36 R31.1
N$43
  Bottom 0.254: R1.1 R2.2 160.02,96.52 160.44,96.94 U14.1
N$44
  Bottom 0.254: J3.5 97.71,45.8 99.06,44.45 U9.14
N$45
  Bottom 0.254: R1.2 171.45,91.44 172.72,92.71 D1.A
  Bottom 1.27: C4.+ D1.A C3.1 172.72,99.06 171.45,100.33 U14.5
N$46
  Bottom 0.254: J3.2 63.58,44.37 64.77,43.18 95.25,43.18 96.52,41.91 U9.13
N$47
  Bottom 0.254: LCD1.15 43.56,19.94 44.45,19.05 R55.1
N$48
  Bottom 0.61: JP6.2 118.91,47.62 J6.2
N$49
  Bottom 0.61: J7.5 149.86,45.92 149.86,48.26 147.32,50.8 TR2.6
N$50
  Bottom 0.61: TR2.4 142.24,53.34 143.51,54.61 151.13,54.61 152.4,53.34 152.4,44.45 151.13,43.18 147.26,43.18 J7.1
N$51
  Bottom 0.61: JP6.1 125.09,50.16 125.73,50.8 TR1.5
N$52
  Top 0.254: U9.1 C35.1
N$53
  Bottom 0.254: U2.2 R24.1 11.43,93.98 8.89,96.52 R25.1
N$54
  Bottom 0.254: R25.2 D2.A U2.1 19.05,99.06 24.13,93.98 U2.12
N$55
  Bottom 0.254: R15.1 25.4,45.88 J5.2
N$56
  Bottom 0.254: R14.1 35.56,45.92 J5.5
N$57
  Bottom 0.254: R14.2 C23.1
N$58
  Bottom 0.254: R19.2 R18.1 41.27,45.09 41.91,45.72 44.45,45.72 J2.2
N$60
  Bottom 0.254: U2.6 R22.2 11.43,88.9 8.89,86.36 R23.1
N$61
  Top 0.254: C35.2 106.68,46.99 105.41,45.72 100.33,45.72 99.06,46.99 U9.3
N$62
  Top 0.254: U2.9 26.67,87.63 26.67,91.44 | 26.67,91.44 R27.1 | U2.13 26.67,96.52 | 26.67,96.52 26.67,91.44 | R26.1 26.67,97.79 26.67,96.52
N$63
  Top 0.254: C26.2 R20.2
  Bottom 0.254: U2.5 20.32,88.9 21.59,90.17 26.67,90.17 R20.2
N$65
  Bottom 0.254: R15.2 C24.1
N$66
  Top 0.254: U9.5 C36.2
N$67
  Top 0.254: U9.4 C36.1
N$68
  Top 0.254: J9.2 43.18,91.44 46.99,87.63 46.99,67.31 52.07,62.23 52.07,52.07 53.34,50.8 73.66,50.8 76.2,48.26 76.2,41.91 77.47,40.64 R58.2 R9.1
N$69
  Bottom 0.254: R23.2 D3.A U2.7 22.86,88.9 U2.10
N$70
  Top 0.254: U9.6 C34.1
N$71
  Bottom 0.254: J4.5 16.63,47.11 15.24,48.26 6.35,48.26 | 6.35,45.88 6.35,45.72 J4.2 6.35,45.88 | R7.1 6.35,48.26 | 6.35,48.26 6.35,45.88
N$72
  Bottom 0.254: R8.1 R7.2 C21.1 C20.1
N$73
  Bottom 0.254: U4.3 R10.2 10.16,71.12 8.89,69.85 8.89,68.58 C21.2
N$74
  Bottom 0.254: U4.2 R11.2 11.43,73.66 8.89,76.2 R12.1
N$75
  Bottom 0.254: R13.1 R12.2 U4.1 20.32,76.2 U4.6
N$76
  Bottom 0.254: C22.2 R13.2
N$77
  Top 0.254: U9.2 C33.2
N$78
  Bottom 1.27: S5.2 S5.3 182.88,80.01 C5.+ D1.C F1.2
N$79
  Top 0.254: LED3.K 163.83,10.16 159.38,10.16 R59.1
N$80
  Top 0.254: S2.1 82.55,22.86 82.55,10.16 83.82,8.89 110.49,8.89 111.76,10.16 133.35,10.16 134.62,8.89 134.62,5.08 135.89,3.81 U3.1
  Bottom 0.254: S2.2 S2.1
N$81
  Top 0.254: R60.1 187.32,10.16 182.88,10.16 LED4.A
N$82
  Bottom 0.254: R56.1 155.57,19.68 Q7.2
N$83
  Bottom 0.254: R57.2 Q7.1 153.03,24.77 154.31,26.04 Q8.2
N$84
  Bottom 0.254: LCD1.16 46.1,21.21 46.99,20.32 115.57,20.32 116.84,21.59 116.84,30.48 118.11,31.75 154.94,31.75 155.57,31.11 Q8.1
N$85
  Bottom 0.254: U8A.7 97.79,69.85 97.79,62.23 U8B.8 R42.1
N$86
  Bottom 0.254: J10.17 173.99,11.43 170.18,11.43 166.37,7.62 163.83,7.62 LED3.A
N$87
  Bottom 0.254: U9.8 72.39,48.26 71.08,46.95 J3.4
N$88
  Bottom 0.254: U9.7 87.63,49.53 67.31,49.53 66.28,48.5 J3.3
N$89
  Top 0.254: U9.10 87.63,39.37 85.09,39.37 77.47,46.99 77.47,49.53 74.93,52.07 55.88,52.07 54.61,53.34 54.61,62.23 49.53,67.31 49.53,87.63 45.72,91.44 J9.3
PA0
  Top 0.254: U1.40 87.63,67.31 87.63,57.15 88.9,55.88 114.3,55.88 115.57,57.15 115.57,63.5 119.38,67.31
  Top 1.27: Q2.3 119.38,67.31 132.08,67.31 | 132.08,67.31 Q1.3 | 138.43,67.31 132.08,67.31 | Q5.3 138.43,67.31 | 138.43,67.31 151.13,67.31 | 151.13,67.31 Q4.3 | R30.2 152.4,67.31 151.13,67.31
PA1
  Top 0.254: C25.1 C26.1 30.48,57.15 31.75,55.88 46.99,55.88 48.26,57.15 J11.5
  Bottom 0.254: J11.5 48.26,52.07 49.53,50.8 76.2,50.8 77.47,52.07 77.47,69.85 78.74,71.12 82.55,71.12 83.82,69.85 U1.39
PA4
  Bottom 0.254: U1.36 76.2,53.34 74.93,52.07 54.61,52.07 53.34,53.34 J11.9
PA5
  Bottom 0.254: U1.35 73.66,67.31 74.93,66.04 74.93,54.61 73.66,53.34 57.15,53.34 55.88,54.61 J11.11
PA6
  Top 0.254: D2.C 8.89,99.06 12.7,102.87 66.04,102.87 67.31,101.6 67.31,74.93 71.12,71.12 U1.34
  Bottom 0.254: R29.1 D2.C C31.1
PA7
  Top 0.254: U1.33 68.58,71.12 64.77,74.93 64.77,100.33 63.5,101.6 17.78,101.6 16.51,100.33 12.7,100.33 8.89,96.52 8.89,85.09 7.62,83.82 D3.C
  Bottom 0.254: R28.1 D3.C C30.1
PB0
  Top 0.254: R48.2 R49.1 151.13,86.36 149.86,85.09 87.63,85.09 U1.1
PB1
  Top 0.254: R51.2 R52.1 138.43,87.63 137.16,86.36 85.09,86.36 83.82,85.09 U1.2
PB2
  Top 0.254: R37.2 R38.1 132.08,88.9 130.81,87.63 82.55,87.63 81.28,86.36 U1.3
PB3
  Top 0.254: U1.4 78.74,86.36 81.28,88.9 118.11,88.9 119.38,90.17 R41.1 R40.2
PB5
  Top 0.254: U8B.3 95.25,69.85 95.25,73.66 91.44,77.47 U8A.4
  Bottom 0.254: U8A.4 88.9,81.28 73.66,81.28 | U1.6 73.66,81.28 | JP1.4 71.12,86.36 69.85,85.09 69.85,82.55 71.12,81.28 73.66,81.28
PB6
  Bottom 0.254: JP1.1 72.39,90.17 72.39,86.36 71.12,85.09 U1.7
PB7
  Top 0.254: U8A.5 90.17,69.85 90.17,67.31 91.44,66.04 95.25,66.04 96.52,67.31 U8B.2
  Bottom 0.254: U8A.5 91.44,76.2 87.63,80.01 69.85,80.01 68.58,81.28 U1.8 68.58,85.09 69.85,86.36 69.85,90.17 JP1.3
PC0  (1 unrouted)
  Top 0.254: J10.2 138.43,33.02 137.16,31.75 137.16,17.78 138.43,16.51 U3.6
  Bottom 0.254: J11.2 43.18,63.5 40.64,66.04 U1.22 | U3.13 131.44,7.62 | 131.44,7.62 U3.12 | U3.6 U3.5 139.7,13.97 140.97,12.7 140.97,8.89 139.7,7.62 131.44,7.62
PC1  (1 unrouted)
  Top 0.254: J10.4 173.99,29.21 176.53,29.21 177.8,30.48 177.8,33.02 176.53,34.29 83.82,34.29 76.2,26.67 19.05,26.67 18.16,27.56 LCD1.5
  Bottom 0.254: U1.23 43.18,66.04 45.72,63.5 J11.4
PC2  (1 unrouted)
  Top 0.254: J10.6 173.99,26.67 177.8,26.67 179.07,27.94 179.07,34.29 177.8,35.56 82.55,35.56 74.93,27.94 21.59,27.94 20.7,28.83 LCD1.6
  Bottom 0.254: J11.6 48.26,63.5 45.72,66.04 U1.24
PC3  (1 unrouted)
  Top 0.254: LCD1.4 15.62,26.29 16.51,25.4 78.74,25.4 80.01,24.13 80.01,6.35 83.82,2.54 177.8,2.54 179.07,3.81 179.07,22.86 177.8,24.13 173.99,24.13 J10.8
  Bottom 0.254: U1.25 48.26,66.04 50.8,63.5 J11.8
PC4  (1 unrouted)
  Top 0.254: U3.10 130.81,13.97 129.54,15.24 129.54,16.51 130.81,17.78 134.62,17.78 137.16,15.24 166.37,15.24 170.18,19.05 170.18,21.59 171.45,22.86 J10.10
  Bottom 0.254: J11.10 53.34,63.5 50.8,66.04 U1.26 | LCD1.11 33.4,14.86 34.29,13.97 U3.10
PC5  (1 unrouted)
  Top 0.254: U3.9 133.35,16.51 137.16,12.7 139.7,12.7 140.97,13.97 166.37,13.97 J10.12
  Bottom 0.254: U1.27 53.34,66.04 55.88,63.5 J11.12 | LCD1.12 35.94,16.13 36.83,15.24 130.18,15.24 U3.9
PC6  (1 unrouted)
  Top 0.254: J10.14 167.64,12.7 142.24,12.7 140.97,11.43 140.97,10.16 139.7,8.89 U3.3
  Bottom 0.254: J11.14 58.42,63.5 55.88,66.04 U1.28 | LCD1.13 38.48,17.4 39.37,16.51 129.54,16.51 130.81,17.78 133.35,17.78 134.62,16.51 134.62,10.16 135.89,8.89 U3.3
PC7  (1 unrouted)
  Top 0.254: J10.16 168.91,11.43 143.51,11.43 142.24,10.16 142.24,7.62 140.97,6.35 U3.2
  Bottom 0.254: U1.29 58.42,66.04 60.96,63.5 J11.16 | LCD1.14 41.02,18.67 41.91,17.78 128.27,17.78 130.81,20.32 134.62,20.32 137.16,17.78 140.97,17.78 142.24,16.51 142.24,7.62 140.97,6.35 U3.2
PD0
  Top 0.254: U9.12 93.98,44.45 92.71,45.72 86.36,45.72 85.09,46.99 85.09,52.07 82.55,54.61 77.47,54.61 76.2,55.88 76.2,63.5 74.93,64.77 56.52,64.77 54.61,66.67 54.61,82.55 U1.14
PD1
  Top 0.254: U1.15 52.07,82.55 52.07,67.31 55.88,63.5 73.66,63.5 74.93,62.23 74.93,54.61 76.2,53.34 81.28,53.34 83.82,50.8 83.82,45.72 85.09,44.45 90.17,44.45 91.44,43.18 U9.11
PD2
  Bottom 0.254: U2.14 26.67,97.79 36.83,97.79 48.26,86.36 U1.16
PD3
  Bottom 0.254: U1.17 45.72,86.36 44.45,87.63 24.13,87.63 23.5,87 23.5,84.45 24.13,83.82 U2.8
PD5  (1 unrouted)
  Bottom 0.254: U1.19 40.64,78.74 43.18,76.2 67.31,76.2 69.85,73.66 69.85,66.04 72.39,63.5 72.39,57.15 71.12,55.88 62.23,55.88 60.96,57.15 J11.15 | LED2.K 146.05,10.16 147.32,11.43 167.64,11.43 170.18,13.97 173.99,13.97 J10.15
PD6  (1 unrouted)
  Bottom 0.254: U1.20 38.1,85.09 39.37,86.36 40.64,86.36 41.91,85.09 41.91,80.01 44.45,77.47 69.85,77.47 72.39,74.93 72.39,66.04 73.66,64.77 73.66,55.88 72.39,54.61 59.69,54.61 58.42,55.88 J11.13 | J10.13 173.99,16.51 171.45,16.51 167.64,12.7 146.05,12.7 144.78,11.43 144.78,6.35 143.51,5.08 128.27,5.08 127,6.35 LED1.K
PD7  (1 unrouted)
  Bottom 0.254: J11.18 63.5,63.5 62.23,64.77 62.23,69.85 60.96,71.12 39.37,71.12 38.1,69.85 U1.21 | R56.2 155.57,9.53 156.21,10.16 167.64,10.16 170.18,12.7 J10.18
PFET_A
  Top 0.254: U10.1 R36.2
  Bottom 0.254: R39.1 125.73,86.36 124.46,85.09 115.57,85.09 114.3,83.82 R36.2
PFET_B
  Top 0.254: R50.1 148.59,91.44 149.86,92.71 154.94,92.71 156.21,91.44 156.21,85.09 154.94,83.82 116.84,83.82 115.57,82.55 115.57,69.85 R47.2 113.03,69.85 110.49,69.85 U10.7
RB4
  Top 0.254: J11.7 50.8,55.88 49.53,54.61 30.48,54.61 29.21,55.88 29.21,95.25 C28.1
  Bottom 0.254: C28.1 C27.1
RB9
  Bottom 0.254: J11.3 45.72,57.15 44.45,55.88 29.21,55.88 27.94,57.15 R17.1 C24.2 27.94,64.77 26.67,66.04 22.86,66.04 21.59,67.31 21.59,72.39 19.05,74.93 12.7,74.93 10.16,77.47 3.81,77.47 C22.1
RB10
  Bottom 0.254: C23.2 R16.1 33.02,59.69 34.29,58.42 J11.1
RESET
  Bottom 0.254: U1.9 66.04,85.09 67.31,86.36 67.31,90.17 JP1.5
STATE  (via drill 0.6)
  Top 0.254: v39.37,59.69 39.37,85.09 40.64,86.36 J9.1
  Bottom 0.254: J11.17 62.23,59.69 v39.37,59.69
V+
  Top 0.254: R3.2 85.09,54.61 113.03,54.61 114.3,53.34 114.3,44.45 115.57,43.18 156.21,43.18 157.48,44.45 157.48,50.8 158.75,52.07 161.16,52.07 J8.PWR
  Bottom 1.27: J8.PWR 163.87,52.11 165.1,53.34 C1.+ C2.1 165.53,96.95 U14.4

## Text on the board
Dimension: V-CUT
tNames: + | J1B | J1A | FluX Research | MK-312BT V1.3 | 12V BAT | MK-312BT V1.3
tValues: 6.3V | 16V | 16V | 16V | 16V | 25V